# Altium PCB ITKS.685623.177 SB.PcbDoc
Units mm, origin at the board's own origin, x right, y up, seen from the top; angles counter-clockwise.
Board outline 62.5 x 52.5 mm, 2 copper layers (Top Layer, Bottom Layer); 62 components, 39 nets, 289 pads, 80 vias.
Unrouted connection lines stored in the file: 2.
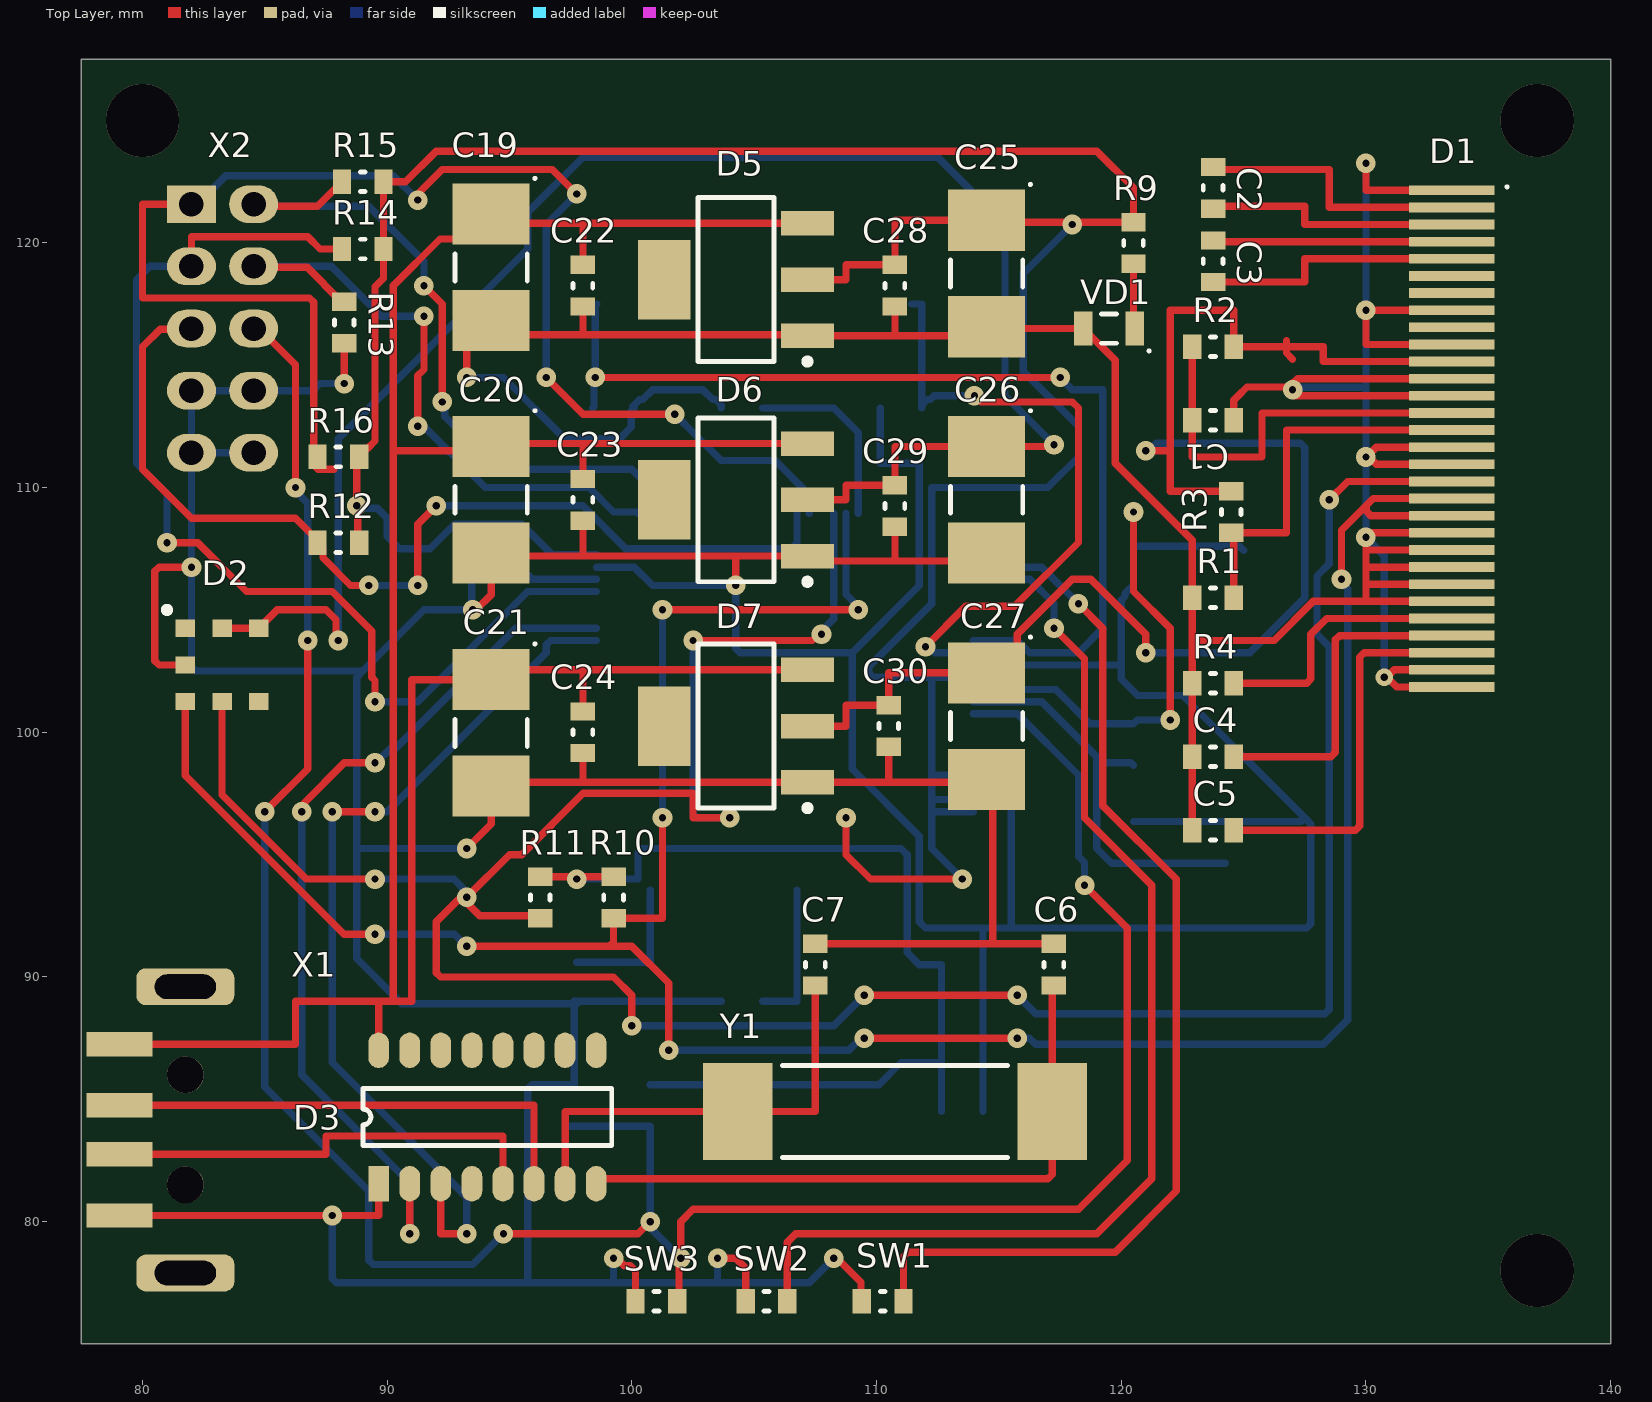
[diagram p0: Top Layer view]
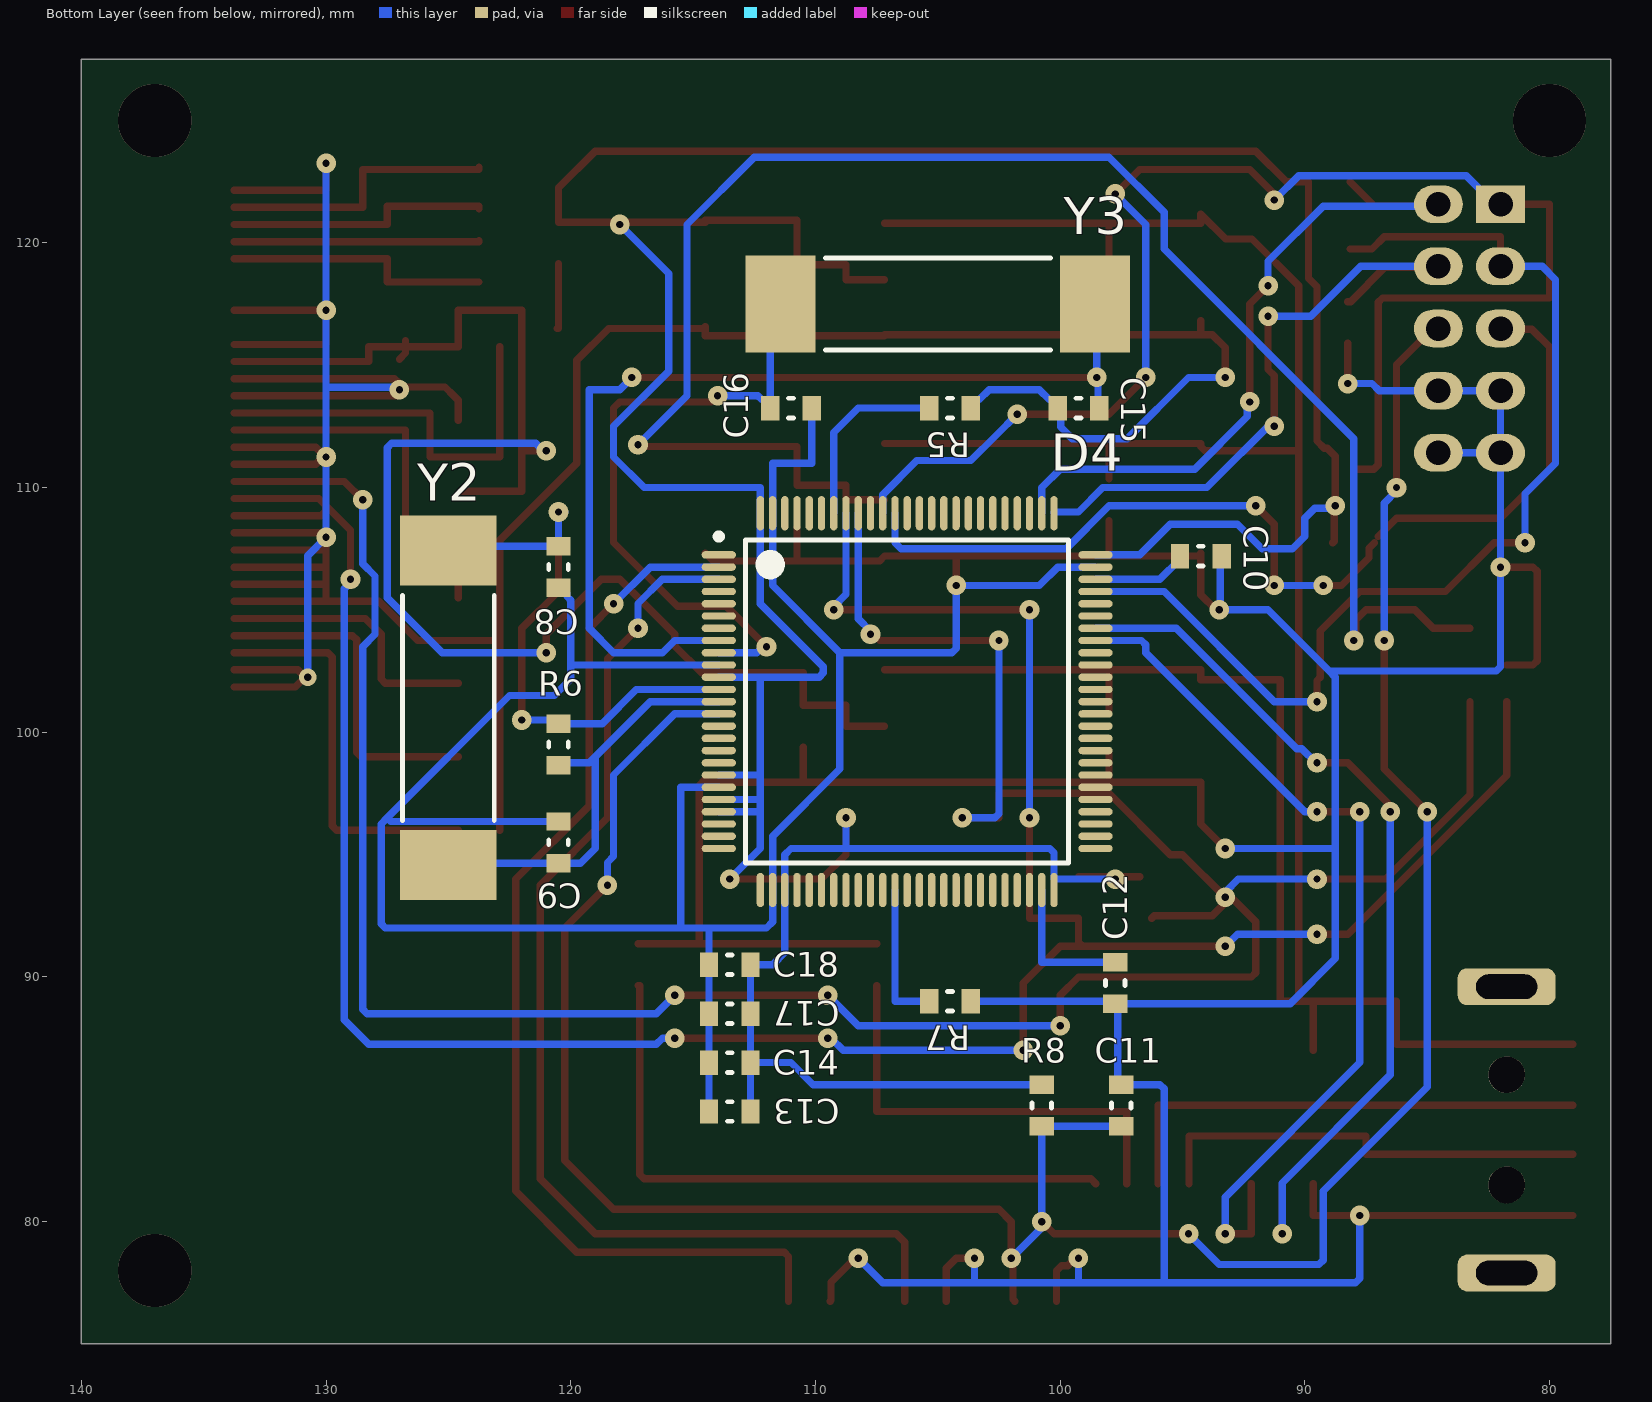
[diagram p1: Bottom Layer view, seen from below]

## Layer stack, top to bottom
Top Solder: solder mask 0.0102, Solder Resist, Dk 3.5
Top Layer: signal copper 0.0356
Dielectric 1: dielectric 0.32, FR-4, Dk 4.8
Bottom Layer: signal copper 0.0356
Bottom Solder: solder mask 0.0102, Solder Resist, Dk 3.5

## Board outline
77.5,75 140,75 140,127.5 77.5,127.5

## Design rules (kind name [scope] priority, off if disabled: settings)
Clearance [All] p1: gap=0.2 ignorepadtopadclearanceinfootprint=FALSE
PolygonConnect [All] p1: connectstyle=Relief reliefconductorwidth=0.254 reliefentries=4 polygonreliefangle="90 Angle" airgapwidth=0.254
RoutingVias [All] p1: holewidth=0.711 width=1.27 viastyle="Through Hole" minholewidth=0.711 minwidth=1.27 maxholewidth=0.711 maxwidth=1.27
SolderMaskExpansion [All] p1: expansion=0.102 istentingtop=FALSE
Width [All] p1: maxlimit=0.4 minlimit=0.2 preferedwidth=0.3 minimp=50.000000 maximp=50.000000 favimp=50.000000
30 further rules are at their usual default settings.

## Components (designator, comment, footprint, x,y, rotation, side; value= is the part's Value field where it differs from the comment)
C1 "104" 0603 123.75,112.75 r180 top
C2 "104" 0603 123.75,122.25 r270 top
C3 "104" 0603 123.75,119.25 r270 top
C4 "475" 0603 123.75,99 r0 top
C5 "225" 0603 123.75,96 r0 top
C6 "22" 0603 117.25,90.5 r90 top
C7 "22" 0603 107.5,90.5 r90 top
C8 "22" 0603 120.5,106.75 r270 bottom
C9 "22" 0603 120.5,95.5 r90 bottom
C10 "104" 0603 94.25,107.2 r180 bottom (schematic designator С10)
C11 "104" 0603 97.5,84.75 r270 bottom
C12 "104" 0603 97.75,89.75 r270 bottom
C13 "104" 0603 113.5,84.5 r0 bottom
C14 "104" 0603 113.5,86.5 r0 bottom
C15 "12" 0603 99.25,113.25 r180 bottom
C16 "12" 0603 111,113.25 r0 bottom
C17 "104" 0603 113.5,88.5 r0 bottom
C18 "104" 0603 113.5,90.5 r0 bottom
C19 "106" EIA_6032–28 94.25,119 r270 top
C20 "106" EIA_6032–28 94.25,109.5 r270 top
C21 "106" EIA_6032–28 94.25,99.975 r270 top
C22 "104" 0603 98,118.25 r90 top
C23 "104" 0603 98,109.5 r90 top
C24 "104" 0603 98,100 r90 top
C25 "106" EIA_6032–28 114.5,118.75 r270 top
C26 "106" EIA_6032–28 114.5,109.5 r270 top
C27 "106" EIA_6032–28 114.5,100.25 r270 top
C28 "104" 0603 110.75,118.25 r90 top
C29 "104" 0603 110.75,109.25 r90 top
C30 "104" 0603 110.5,100.25 r90 top
D1 "SSD1306 OLED" SSD1306 134.75,112 r0 top
D2 "BMP180" BMP180 65.5,104.25 r180 top
D3 "CH340G" SOP16 89.65,81.55 r90 top
D4 "STM32F407VE" LQFP100 106.25,101.25 r180 bottom
D5 "AMS1117-3.3L" SOT223-4N 104.25,118.5 r180 top
D6 "AMS1117-3.3L" SOT223-4N 104.25,109.5 r180 top
D7 "AMS1117-3.3L" SOT223-4N 104.25,100.25 r180 top
R1 "100" 0603 123.75,105.5 r180 top
R2 "4.7k" 0603 123.75,115.75 r180 top
R3 "10" 0603 124.5,109 r270 top
R4 "410k" 0603 123.75,102 r180 top
R5 "10k" 0603 104.5,113.25 r180 bottom
R6 "1M" 0603 120.5,99.5 r90 bottom
R7 "10k" 0603 104.5,89 r0 bottom
R8 "10k" 0603 100.75,84.75 r90 bottom
R9 "510" 0603 120.5,120 r270 top
R10 "4.7k" 0603 99.25,93.25 r90 top
R11 "4.7k" 0603 96.25,93.25 r90 top
R12 "10k" 0603 88,107.75 r0 top
R13 "10k" 0603 88.25,116.75 r270 top
R14 "10k" 0603 89,119.75 r0 top
R15 "10k" 0603 89,122.5 r0 top
R16 "10k" 0603 88,111.25 r0 top
SW1 "Mode(KEY1)" 0603 110.25,76.75 r0 top
SW2 "Count (KEY0)" 0603 105.5,76.75 r0 top
SW3 "RST" 0603 101,76.75 r0 top
VD1 "LED SMD 0805" "Led Diode 0805" 119.5,116.5 r180 top
X1 "USB-A" "USB-ASM (DS1098-B)" 81.75,83.75 r90 top
X2 "PLC-10" PLC-10 82,121.58 r0 top
Y1 "12M" HC-49SM 110.75,84.5 r0 top
Y2 "8МГц" HC-49SM 125,101 r90 bottom
Y3 "32.768k" HC-49SM 105,117.5 r180 bottom

## Footprints (in the part's own frame and the unit in brackets; to place one, negate y for a bottom-side part, rotate by r counter-clockwise, add the part's x,y. Pads: shape width x height; smd on the part's side, far side on the other; paste and mask are expansions set on the pad)
0603 [mm] "Chip Resistor, 2-Leads, Body 1,63x0,93mm, IPC Medium Density"
  rect 0.75x1 smd: 1(-0.85,0) 2(0.85,0)
  silkscreen extent -0.1,-0.4 0.1,0.4, body extent -0.85,-0.48 0.85,0.47, height 0.45
BMP180 [mm] "CQFP, 4-Leads, Body 33,53x33,53mm, Pitch 1,50mm, IPC Medium Density"
  rect 0.8x0.7 smd: 1(-16.25,0) 3(-19.25,0) 4(-19.25,3) 5(-17.75,3) 6(-16.25,3) 7(-16.25,1.5)
  rect 0.8x0.7 smd mask+0.102: 2(-17.75,0)
  silkscreen extent -15.63,-0.87 -15.38,-0.63
EIA_6032–28 [mm] "Chip Capacitor, 2-Leads, Body 6,00x3,00mm, IPC Medium Density"
  rect 2.5x3.15 smd: 1(-2.175,0) 2(2.175,0)
  silkscreen extent -3.69,-1.47 0.55,1.84, body extent -3,-1.5 3,1.5, height 3
HC-49SM [mm] "Chip BQ"
  rect 2.85x3.95 smd: 1(-6.425,0) 2(6.425,0)
  silkscreen extent -4.6,-1.88 4.6,1.88, body extent -7.5,-1.9 7.5,1.9, height 5
"Led Diode 0805" [mm] "Chip Diode, 2-Leads, Body 2,05x1,25mm, IPC Medium Density"
  rect 0.75x1.4 smd: A(-1.05,0) K(1.05,0)
  silkscreen extent -1.69,-0.6 0.3,0.96
LQFP100 [mm] "SQFP, 100-Leads, Body 14,00x14,00mm, Pitch 0,50mm, IPC Medium Density"
  oval 1.4x0.3 smd mask+0.102: 1(-7.7,6) 2(-7.7,5.5) 3(-7.7,5) 4(-7.7,4.5) 5(-7.7,4) 6(-7.7,3.5) 7(-7.7,3) 8(-7.7,2.5) 9(-7.7,2) 10(-7.7,1.5) 11(-7.7,1) 12(-7.7,0.5) 13(-7.7,0) 14(-7.7,-0.5) 15(-7.7,-1) 16(-7.7,-1.5) 17(-7.7,-2) 18(-7.7,-2.5) 19(-7.7,-3) 20(-7.7,-3.5) 21(-7.7,-4) 22(-7.7,-4.5) 23(-7.7,-5) 24(-7.7,-5.5) 25(-7.7,-6) 51(7.7,-6) 52(7.7,-5.5) 53(7.7,-5) 54(7.7,-4.5) 55(7.7,-4) 56(7.7,-3.5) 57(7.7,-3) 58(7.7,-2.5) 59(7.7,-2) 60(7.7,-1.5) 61(7.7,-1) 62(7.7,-0.5) 63(7.7,0) 64(7.7,0.5) 65(7.7,1) 66(7.7,1.5) 67(7.7,2) 68(7.7,2.5) 69(7.7,3) 70(7.7,3.5) 71(7.7,4) 72(7.7,4.5) 73(7.7,5) 74(7.7,5.5) 75(7.7,6)
  oval 0.3x1.4 smd mask+0.102: 26(-6,-7.7) 27(-5.5,-7.7) 28(-5,-7.7) 29(-4.5,-7.7) 30(-4,-7.7) 31(-3.5,-7.7) 32(-3,-7.7) 33(-2.5,-7.7) 34(-2,-7.7) 35(-1.5,-7.7) 36(-1,-7.7) 37(-0.5,-7.7) 38(0,-7.7) 39(0.5,-7.7) 40(1,-7.7) 41(1.5,-7.7) 42(2,-7.7) 43(2.5,-7.7) 44(3,-7.7) 45(3.5,-7.7) 46(4,-7.7) 47(4.5,-7.7) 48(5,-7.7) 49(5.5,-7.7) 50(6,-7.7) 76(6,7.7) 77(5.5,7.7) 78(5,7.7) 79(4.5,7.7) 80(4,7.7) 81(3.5,7.7) 82(3,7.7) 83(2.5,7.7) 84(2,7.7) 85(1.5,7.7) 86(1,7.7) 87(0.5,7.7) 88(0,7.7) 89(-0.5,7.7) 90(-1,7.7) 91(-1.5,7.7) 92(-2,7.7) 93(-2.5,7.7) 94(-3,7.7) 95(-3.5,7.7) 96(-4,7.7) 97(-4.5,7.7) 98(-5,7.7) 99(-5.5,7.7) 100(-6,7.7)
  silkscreen extent -7.83,-6.6 6.6,6.87
PLC-10 [mm]
  rect 2x1.54 hole 1 mask+0.2: 1(0,0)
  oval 2x1.54 hole 1 mask+0.2: 2(2.54,0) 3(0,-2.54) 4(2.54,-2.54) 5(0,-5.08) 6(2.54,-5.08) 7(0,-7.62) 8(2.54,-7.62) 9(0,-10.16) 10(2.54,-10.16)
SOP16 [mm]
  rect 1.45x0.85 smd: 1(0,0)
  oval 1.45x0.85 smd: 2(0,-1.27) 3(0,-2.54) 4(0,-3.81) 5(0,-5.08) 6(0,-6.35) 7(0,-7.62) 8(0,-8.89) 9(5.45,-8.89) 10(5.45,-7.62) 11(5.45,-6.35) 12(5.45,-5.08) 13(5.45,-3.81) 14(5.45,-2.54) 15(5.45,-1.27) 16(5.45,0)
  silkscreen extent 1.56,-9.53 3.89,0.64
SOT223-4N [mm] "SOT223, 4-Leads, Body 6,50x7,00mm (avg), Pitch 2,30mm, IPC Medium Density"
  rect 2.15x1 smd: 1(-2.925,2.3) 2(-2.925,0) 3(-2.925,-2.3)
  rect 2.15x3.25 smd: 4(2.925,0)
  silkscreen extent -3.05,-3.35 1.55,3.47
SSD1306 [mm] "Chip Array, 30 pin"
  rect 3.5x0.4 smd mask+0.102: 1(-1.25,10.15) 2(-1.25,9.45) 3(-1.25,8.75) 4(-1.25,8.05) 5(-1.25,7.35) 6(-1.25,6.65) 7(-1.25,5.95) 8(-1.25,5.25) 9(-1.25,4.55) 10(-1.25,3.85) 11(-1.25,3.15) 12(-1.25,2.45) 13(-1.25,1.75) 14(-1.25,1.05) 15(-1.25,0.35) 16(-1.25,-0.35) 17(-1.25,-1.05) 18(-1.25,-1.75) 19(-1.25,-2.45) 20(-1.25,-3.15) 21(-1.25,-3.85) 22(-1.25,-4.55) 23(-1.25,-5.25) 24(-1.25,-5.95) 25(-1.25,-6.65) 26(-1.25,-7.35) 27(-1.25,-8.05) 28(-1.25,-8.75) 29(-1.25,-9.45) 30(-1.25,-10.15)
  silkscreen extent 0.97,10.24 1.07,10.34
"USB-ASM (DS1098-B)" [mm]
  rect 1x2.7 smd: 1(3.5,2.7) 2(1,2.7) 3(-1,2.7) 4(-3.5,2.7)
  rrect50% 1.5x4 hole 1 slot 2.5 at 90 deg: 5(-5.85,0) 5(5.85,0)
  round 1.5 hole 1.5 unplated: 6(-2.25,0) 6(2.25,0)

## Part data
C1 C2 C3 C4 C5 C6 C7 C8 C9 C10 C11 C12 C13 C14 C15 C16 C17 C18 C22 C23 C24 C28 C29 C30: library part C
C19 C20 C21 C25 C26 C27: library part "C+ TECAP", "TECAP EIA 6032–28"
D4: "ARM3"
R1 R2 R3 R4 R5 R6 R7 R8 R9 R10 R11 R12 R13 R14 R15 R16: library part R
SW1 SW2 SW3: library part Button
Y1 Y2 Y3: library part BQ

## Via types
v1: diameter 0.8, hole 0.3, Top Layer to Bottom Layer, 76 vias
v2: diameter 3, hole 3, Top Layer to Bottom Layer, 3 vias
v3: diameter 0.7, hole 0.3, Top Layer to Bottom Layer, 1 vias

## Nets (pads, with @x,y where several pads share a name; then routed paths per layer and width w, separated by ;. In a path a pad name is that pad's centre, name@x,y a point inside that pad or via, vN(x,y) a via of type N, cw(c..) or ccw(c..) an arc to the next point about the centre after c; other vN are vias at no path point)
+3.3В: C13.1 C14.1 C17.1 C18.1 C25.1 C28.2 D4.11 D4.19 D4.21 D4.22 D4.28 D4.50 D4.75 D4.100 D5.2 R8.2 R9.1 R10.2 R11.2 R12.2 R14.2 R15.2 R16.2 | length 170.2
  Top Layer w0.3: R12.2 88.8,107.8 88.8,109.2 v1(88.75,109.25) 88.75,111.275 89.075,111.6 89.2,111.6 89.5,111.9 89.5,118.207 89.85,118.557 R14.2 R15.2 90.75,122.5 92,123.75 119,123.75 120.5,122.25 R9.1 114.5,120.85 C25.1 110.75,120.925 C28.2 108.75,119.1 108.75,118.5 D5.2 ; R11.2@96.75,94.1 R10.2 ; v1(108.75,96.5) 108.75,95 109.75,94 v1(113.5,94)
  Bottom Layer w0.3: v1(88.75,109.25) 88.846,109.154 89.596,109.154 90,108.75 90,108 90.5,107.5 91.75,107.5 92.75,108.5 95.5,108.5 96.75,107.25 D4.75 ; v1(97.75,94) 100.25,94 100.25,95.074 100.426,95.25 108.75,95.25 ; R8.2 110.1,85.6 111,86.5 C14.1 ; v1(108.75,96.5) 108.75,95.25 ; C13.1 C14.1 ; v1@113.5,93.75 v1(113.5,94) 112.25,95.25 112.25,96.75 ; D4.22 112.25,96.75 ; D4.21 112.25,97.25 ; D4.19 112.25,98.25 ; D4.11 112.25,102.25 ; v1(118,120.75) 116,118.75 116,114.75 118.25,112.5 118.25,111.25 117,110 112.25,110 D4.100 112.25,105.25 109.674,102.674 109.674,102.426 109.85,102.25 112.25,102.25 ; 108.75,95.25 111,95.25 111.25,95 D4.28 111.25,91 111.75,90.5 C18.1 C17.1 C14.1 ; 112.25,96.75 112.25,97.25 ; 112.25,97.25 112.25,98.25 ; 112.25,98.25 112.25,102.25
+3.3В_BMP: C26.1 C29.2 D2.2 D2.3 D6.2 | length 70.4
  Top Layer w0.3: D2.2 D2.3 85.5,105 87.5,105 87.904,104.596 87.904,103.846 v1(88,103.75) ; D6.2 108.75,109.5 108.75,110.1 C29.2 110.75,111.675 C26.1 117.175,111.675 v1(117.25,111.75)
  Bottom Layer w0.3: v1(88,103.75) 88,112 95.75,119.75 95.75,121.25 98,123.5 112.5,123.5 115.25,120.75 115.25,113.75 v1(117.25,111.75)
+3.3В_SSD: C27.1 C30.2 D1.9 D1.11 D7.2 R2.1 R3.1 | length 64.6
  Top Layer w0.3: D7.2 108.75,100.25 108.75,101.1 C30.2 110.5,102.425 114.65,102.425 115.75,103.525 115.75,104 118,106.25 118.75,106.25 121,104 v1(121,103.25) ; v1(121,111.5) 122,111.5 ; R3.1 122,109.85 122,111.5 ; D1.11@133.75,115.15 128.25,115.15 128.25,115.75 R2.1 124.6,117.25 122,117.25 122,111.5
  Bottom Layer w0.3: v1(121,103.25) 125.25,103.25 127.5,105.5 127.5,111.63 127.324,111.805 121.426,111.805 121.12,111.5 v1(121,111.5)
+5: C19.1 C20.1 C21.1 C22.2 C23.2 C24.2 D3.16 D5.3 D6.3 D7.3 X1.1 | length 115.1
  Top Layer w0.3: X1.1 86.25,87.25 86.25,89 89.65,89 ; D3.16 89.65,89 ; 90.966,89 90.25,89 ; 90.996,89 90.996,102.15 ; 91.026,102.15 91.1,102.15 C21.1 94.25,102.55 98,102.55 ; C24.2 98,102.55 ; C23.2 98,111.8 ; C22.2 98,120.8 ; D7.3 98,102.55 ; D6.3 98,111.8 ; D5.3 98,120.8 ; 89.65,89 90.25,89 ; 90.25,89 90.25,111.5 ; 90.25,111.5 94.075,111.5 C20.1 94.25,111.8 98,111.8 ; 90.25,111.5 90.25,118.25 92.157,120.157 93.232,120.157 C19.1 94.25,120.8 98,120.8
GND: C1.1 C4.1 C5.1 C6.2 C7.2 C8.2 C9.2 C10.2 C11.1 C12.2 C13.2 C14.2 C15.1 C16.1 C17.2 C18.2 C19.2 C20.2 C21.2 C22.1 C23.1 C24.1 C25.2 C26.2 C27.2 C28.1 C29.1 C30.1 D1.1 D1.8 D1.10 D1.12 D1.13 D1.16 D1.17 D1.21 D1.22 D1.23 D1.24 D1.25 D1.29 D1.30 D2.7 D3.1 D4.10 D4.20 D4.27 D4.74 D4.99 D5.1 D6.1 D7.1 R1.2 R4.2 R5.2 R7.1 R13.2 SW1.1 SW2.1 SW3.1 VD1.K X1.4 X2.7 X2.8 X2.9 X2.10 | length 467.4
  Top Layer w0.3: X1.4 v1(87.75,80.25) 89.65,80.25 D3.1 ; D2.7 80.676,102.75 80.5,102.926 80.5,106.574 80.676,106.75 v1(82,106.75) ; v1(88.25,114.25) R13.2 ; v1(93.25,95.25) 94.25,96.25 C21.2 94.25,97.95 98,97.95 ; v1(93.25,114.5) 93.25,115.725 93.775,116.25 C19.2@94.25,116.25 ; v1(93.5,105) 93.625,105 94.25,105.625 C20.2@94.25,107.2 ; C20.2 C20.2@94.25,107.2 ; C19.2 C19.2@94.25,116.25 ; C24.1 98,97.95 ; C23.1 98,107.2 ; C22.1 98,116.25 ; v1(99.25,78.5) 99.385,78.5 99.693,78.192 99.944,78.192 100.15,77.986 SW3.1 ; v1(103.5,78.5) 104.25,78.5 104.65,78.1 SW2.1 ; v1(104.25,106) 104.25,107.2 ; C7.2 114.75,91.35 ; v1(108.25,78.5) 108.385,78.5 109.361,77.524 109.361,76.789 SW1.1 ; C30.1 110.5,97.95 ; C29.1 110.75,107 ; C28.1 110.75,116.2 ; C26.2 114.175,107 110.75,107 ; C25.2 C25.2@114.5,116.5 ; C6.2 114.75,91.35 ; C5.1 C4.1 R4.2 122.9,103.75 ; C1.1 124.6,113.574 124.776,113.75 125.136,114.11 v1@126.75,114.11 ; v1@127.036,114.286 127.2,114.45 D1.12@133.75,114.45 ; v1@127.112,113.75 D1.13@133.75,113.75 ; v1@130,108 v1(130,107.966) 130,107.45 ; v1@130,108.15 D1.21@133.75,108.15 ; v1(130,123.25) 130,122.15 D1.1@133.75,122.15 ; v3(130.75,102.25) v3@130.858,102.25 ; D1.30@133.75,101.85 131.258,101.85 v3@130.858,102.25 ; D1.29@133.75,102.55 131.158,102.55 v3@130.858,102.25 ; D1.25@133.75,105.35 130,105.35 ; D1.24@133.75,106.05 130,106.05 ; D1.23@133.75,106.75 130,106.75 ; D1.22@133.75,107.45 130,107.45 ; D1.17@133.75,110.95 130.426,110.95 130.126,111.25 v1(130,111.25) 130.026,111.25 130.426,111.65 D1.16@133.75,111.65 ; D1.10@133.75,115.85 130,115.85 v1(130,117.25) D1.8@133.75,117.25 ; C20.2@94.25,107.2 98,107.2 ; C19.2@94.25,116.25 98,116.25 ; 98,97.95 D7.1 110.5,97.95 ; 98,107.2 104.25,107.2 ; 98,116.25 107.175,116.25 D5.1 110.75,116.2 ; 104.25,107.2 D6.1 107.375,107 110.75,107 ; 110.5,97.95 114.5,97.95 C27.2 114.75,97.825 114.75,91.35 ; 110.75,116.2 114.5,116.2 C25.2@114.5,116.5 ; C25.2@114.5,116.5 VD1.K 119.75,115.2 119.75,111 122.9,107.85 R1.2 122.9,103.75 ; 122.9,103.75 126.25,103.75 127.85,105.35 130,105.35 ; 130,105.35 130,106.05 ; 130,106.05 130,106.75 ; 130,106.75 130,107.45
  Bottom Layer w0.3: X2.10 X2.9 ; v1(87.75,80.25) 87.75,77.676 87.926,77.5 95.75,77.5 ; v1(88.25,114.25) 87.25,114.25 86.96,113.96 X2.8 X2.7 X2.9 ; v1(93.25,95.25) 88.75,95.25 ; C10.2@93.325,107.275 93.45,107.15 93.45,105.05 v1(93.5,105) 91.5,105 89,102.5 ; v1@93.325,114.425 v1(93.25,114.5) 94.75,114.5 97.25,112 99.5,112 99.976,112.476 99.976,113.126 C15.1 ; C12.2@97.65,89 R7.1 ; C12.2 C12.2@97.65,88.9 ; D4.74 100.1,106.75 100.85,106 v1(104.25,106) 104.25,103.426 104.426,103.25 109,103.25 ; v1(99.25,78.5) 99.25,77.5 ; C15.1@100.037,113.312 100.325,113.6 100.45,113.6 100.85,114 102.9,114 103.3,113.6 103.425,113.6 103.65,113.375 R5.2 ; v1(103.5,78.5) 103.5,77.5 ; v1(108.25,78.5) 107.25,77.5 103.5,77.5 ; C16.1 110.15,111 111.75,111 D4.99 111.75,106 109,103.25 ; D4.20 115.5,97.75 115.5,92 ; D4.10 120,102.75 ; C13.2 C14.2 C17.2 C18.2 114.35,91.9 114.25,92 ; C9.2 127.35,96.35 127.5,96.5 ; C8.2 120.375,105.9 120.15,105.675 120.15,105.55 120,105.4 120,102.75 ; v1@127,114.1 130,114.1 ; v1(130,123.25) v1(130,117.25) 130,114.1 ; v3(130.75,102.25) 130.75,107.216 v1(130,107.966) 130,114.1 ; X2.9 v1(82,106.75) 82,102.676 82.176,102.5 89,102.5 ; 88.75,95.25 88.75,90.75 90.6,88.9 C12.2@97.65,88.9 ; 88.75,95.25 88.75,102.25 89,102.5 ; 95.75,77.5 99.25,77.5 ; 95.75,77.5 95.75,85.424 95.926,85.6 C11.1 97.65,85.6 C12.2@97.65,88.9 ; 99.25,77.5 103.5,77.5 ; 109,103.25 109,98.5 111.75,95.75 D4.27 111.75,92.25 112,92 114.25,92 ; 114.25,92 115.5,92 ; 115.5,92 127.574,92 127.75,92.176 127.75,96.25 127.5,96.5 ; 120,102.75 120,102.176 120.676,101.5 122.5,101.5 127.5,96.5
  other v1: 127,114
NetC1_2: C1.2 D1.14 R2.2 | length 17.1
  Top Layer w0.3: R2.2 C1.2 122.9,111.25 125.75,111.25 125.75,113.05 D1.14@133.75,113.05
NetC2_1: C2.1 D1.2 | length 11.7
  Top Layer w0.3: C2.1 123.75,123 128.5,123 128.5,121.45 D1.2@133.75,121.45
NetC2_2: C2.2 D1.3 | length 10.9
  Top Layer w0.3: C2.2 123.75,121.5 127.5,121.5 127.5,120.75 D1.3@133.75,120.75
NetC3_1: C3.1 D1.4 | length 10.1
  Top Layer w0.3: C3.1 123.75,120.05 D1.4@133.75,120.05
NetC3_2: C3.2 D1.5 | length 10.9
  Top Layer w0.3: C3.2 127.5,118.4 127.5,119.35 D1.5@133.75,119.35
NetC4_2: C4.2 D1.27 | length 13.9
  Top Layer w0.3: C4.2 128.574,99 128.75,99.176 128.75,103.774 128.926,103.95 D1.27@133.75,103.95
NetC5_2: C5.2 D1.28 | length 16.2
  Top Layer w0.3: C5.2 129.574,96 129.75,96.176 129.75,103.074 129.926,103.25 D1.28@133.75,103.25
NetC6_1: C6.1 D3.8 Y1.2 | length 26.6
  Top Layer w0.3: D3.8 98.74,81.75 116.999,81.75 117.175,81.926 Y1.2 117.175,89.65 C6.1
NetC7_1: C7.1 D3.7 Y1.1 | length 18.3
  Top Layer w0.3: D3.7 97.27,84.5 Y1.1 107.5,84.5 C7.1
NetC8_1: C8.1 D4.12 R6.2 Y2.2 | length 23.9
  Top Layer w0.3: v1(120.5,109) 120.5,105.75 122,104.25 v1(122,100.5)
  Bottom Layer w0.3: D4.12 117.316,101.75 118.716,100.35 R6.2 120.65,100.5 v1(122,100.5) ; v1@120.25,109 120.5,108.75 C8.1 124.825,107.6 Y2.2
NetC9_1: C9.1 D4.13 R6.1 Y2.1 | length 16.9
  Bottom Layer w0.3: D4.13 116.75,101.25 119,99 ; R6.1 120.4,98.75 119.25,98.75 119,99 ; Y2.1@124.25,94.65 119.6,94.65 119,95.25 119,99
NetC10_1: C10.1 D4.73 | length 3.9
  Bottom Layer w0.3: C10.1 95.1,107.075 95.925,106.25 D4.73
NetC12_1: C12.1 D4.49 | length 6
  Bottom Layer w0.3: C12.1 100.75,90.6 D4.49
NetC15_2: C15.2 D4.8 Y3.2 | length 41
  Top Layer w0.3: v1(98.5,114.5) v1(117.5,114.5)
  Bottom Layer w0.3: C15.2 98.45,113.3 98.45,114.45 v1(98.5,114.5) 98.5,117.425 Y3.2 ; D4.8 115.75,103.75 116.25,103.25 118.25,103.25 119.25,104.25 119.25,114 118,114 v1(117.5,114.5)
NetC16_2: C16.2 D4.9 Y3.1 | length 27
  Top Layer w0.3: v1(112,103.5) 113.644,105.144 115.639,105.144 118.25,107.755 118.25,113.25 118,113.5 114.25,113.5 v1(114,113.75)
  Bottom Layer w0.3: Y3.1 111.85,117.5 C16.2@111.85,113.375 ; C16.2 C16.2@111.85,113.375 ; v1(112,103.5) 112.135,103.5 112.385,103.25 D4.9 ; v1(114,113.75) 112.35,113.75 112.2,113.6 112.075,113.6 C16.2@111.85,113.375
NetD1_15: D1.15 R1.1 R3.2 | length 15.9
  Top Layer w0.3: R3.2 124.6,108.05 R1.1 ; R3.2@124.75,108.15 126.75,108.15 126.75,112.35 D1.15@133.75,112.35
NetD1_26: D1.26 R4.1 | length 11.3
  Top Layer w0.3: R4.1 127.574,102 127.75,102.176 127.75,104 128.4,104.65 D1.26@133.75,104.65
NetD3_5: D3.5 X1.3 | length 18.4
  Top Layer w0.3: X1.3 87.5,82.75 87.5,83.5 94.73,83.5 D3.5
NetD3_6: D3.6 X1.2 | length 20.2
  Top Layer w0.3: X1.2 96,84.75 D3.6
NetD4_2: D4.2 SW1.2 | length 44.7
  Top Layer w0.3: SW1.2 111.1,78.574 111.276,78.75 119.75,78.75 122.25,81.25 122.25,94 119.25,97 119.25,104.25 v1(118.25,105.25)
  Bottom Layer w0.3: D4.2 116.75,106.75 v1(118.25,105.25)
NetD4_3: D4.3 SW2.2 | length 47.3
  Top Layer w0.3: SW2.2 106.35,79.15 106.7,79.5 119,79.5 121.25,81.75 121.25,93.75 118.5,96.5 118.5,103 v1(117.25,104.25)
  Bottom Layer w0.3: D4.3 116.262,106.25 117.25,105.262 v1(117.25,104.25)
NetD4_37: D4.37 R7.2 | length 6
  Bottom Layer w0.3: R7.2 106.75,89 D4.37
NetD4_94: D4.94 R5.1 | length 7.6
  Bottom Layer w0.3: R5.1 108.25,113.25 109.25,112.25 D4.94
NetR9_2: R9.2 VD1.A | length 2.7
  Top Layer w0.3: R9.2 120.5,116.5 VD1.A
RST: C11.2 D4.14 R8.1 SW3.2 X2.6 | length 107.6
  Top Layer w0.3: X2.6 84.77,116.5 86.25,115.02 v1(86.25,110) ; v1(85,96.75) 86.75,98.5 v1(86.75,103.75) ; v1(94.75,79.5) 100.25,79.5 v1(100.75,80) ; SW3.2 101.925,76.825 101.925,78.425 v1(102,78.5) 102,80 102.5,80.5 118.25,80.5 120.25,82.5 120.25,92 v1(118.5,93.75)
  Bottom Layer w0.3: v1(85,96.75) 85,85.5 89.25,81.25 89.25,78.426 89.426,78.25 93.5,78.25 v1(94.75,79.5) ; v1(86.25,110) 86.25,109.865 86.75,109.365 v1(86.75,103.75) ; C11.2 R8.1 100.75,79.75 v1(102,78.5) ; D4.14 115.75,100.75 118.25,98.25 118.25,94.926 118.5,94.676 v1(118.5,93.75)
RxD: D3.3 D4.68 | length 36.5
  Top Layer w0.3: v1(87.75,96.75) v1(89.5,96.75) ; D3.3 92.19,79.5 v1(93.25,79.5)
  Bottom Layer w0.3: v1(87.75,96.75) 87.75,86.5 93.25,81 v1(93.25,79.5) ; v1(89.5,96.75) 90,96.75 96.5,103.25 96.5,103.574 96.676,103.75 D4.68
SCL: D1.18 D2.5 D4.92 R11.1 | length 121.4
  Top Layer w0.3: D2.5 83.25,97.439 86.689,94 v1(89.5,94) ; R11.1 96.15,92.5 93.786,92.5 93.25,93.036 v1(93.25,93.25) ; v1(100,88) 100,89.25 99.25,90 92.176,90 92,90.176 92,92.25 92.904,93.154 93.154,93.154 v1(93.25,93.25) ; v1(102.5,103.75) 107.365,103.75 107.615,104 v1(107.75,104) ; v1(104,96.5) 102.5,96.5 102.5,97.5 98,97.5 95.5,95 95,95 v1(93.25,93.25) ; v1(109.5,89.25) v1(115.75,89.25) ; v1(128.5,109.5) 129.25,110.25 D1.18@133.75,110.25
  Bottom Layer w0.3: v1(89.5,94) 92.714,94 93.25,93.464 v1(93.25,93.25) ; v1(100,88) 108.25,88 v1(109.5,89.25) ; v1(102.5,103.75) 102.5,96.676 102.676,96.5 v1(104,96.5) ; v1(107.75,104) 107.75,104.135 108.25,104.635 D4.92 ; v1(115.75,89.25) 116.5,88.5 128.324,88.5 128.5,88.676 128.5,103.5 128,104 128,106.385 128.5,106.885 v1(128.5,109.5)
SDA: D1.19 D1.20 D2.6 D4.93 R10.1 | length 114.9
  Top Layer w0.3: D2.6 81.75,98.232 88.232,91.75 v1(89.5,91.75) ; v1(93.25,91.25) 99.074,91.25 ; v1(101.25,96.5) 101.25,92.4 R10.1 99.25,91.426 99.074,91.25 ; v1(101.5,87) 101.5,89.75 100,91.25 99.074,91.25 ; v1@101.5,105 v1(109.25,105) ; v1(109.5,87.5) v1(115.75,87.5) ; v1@129,106.024 v1(129,106.25) 129,108.25 130.024,109.274 ; D1.20@133.75,108.85 130.2,108.85 130.024,109.026 130.024,109.274 ; D1.19@133.75,109.55 130.3,109.55 130.024,109.274
  Bottom Layer w0.3: v1(89.5,91.75) 92.75,91.75 v1(93.25,91.25) ; v1(101.25,96.5) v1(101.25,105) ; v1(101.5,87) 108.865,87 109.365,87.5 v1(109.5,87.5) ; D4.93 108.75,105.635 109.25,105.135 v1(109.25,105) ; v1(115.75,87.5) 116.25,87.5 116.5,87.25 128.25,87.25 129.25,88.25 129.25,105.865 129,106.115 v1(129,106.25)
TCK: D4.76 R13.1 X2.4 | length 27.6
  Top Layer w0.3: X2.4 84.58,119 86.725,119 88.125,117.6 R13.1 ; v1(91.25,112.5) 91.25,114.577 91.5,114.827 v1(91.5,117)
  Bottom Layer w0.3: X2.4 87.71,119.04 89.75,117 v1(91.5,117) ; v1(91.25,112.5) 91.25,112.75 94,110 98.25,110 99.25,109 100.25,109 D4.76
TDI: D4.77 R15.1 X2.2 | length 29.4
  Top Layer w0.3: X2.2 84.54,121.5 87.15,121.5 R15.1 ; v1(91.5,118.25) 92.25,117.5 v1(92.25,113.5)
  Bottom Layer w0.3: X2.2 84.62,121.5 89.25,121.5 91.5,119.25 v1(91.5,118.25) ; v1(92.25,113.5) 92.346,113.404 92.346,112.904 94.5,110.75 100,110.75 100.75,110 D4.77
TDO: D4.89 R12.1 X2.5 | length 40.8
  Top Layer w0.3: X2.5 81.976,116.476 80.726,116.476 80,115.75 80,110.75 82,108.75 86.25,108.75 R12.1@87,108 ; R12.1 87.375,107.525 87.375,107.125 88.5,106 v1(89.25,106) ; v1(91.25,106) 91.25,108.5 v1(92,109.25)
  Bottom Layer w0.3: v1(89.25,106) v1(91.25,106) ; v1(92,109.25) 98,109.25 99.75,107.5 106.5,107.5 106.75,107.75 D4.89
TMS: D4.72 R14.1 X2.3 | length 45
  Top Layer w0.3: v1(81,107.75) 82.25,107.75 84.25,105.75 87.75,105.75 89.364,104.136 89.364,102.25 89.5,102.114 v1(89.5,101.25) ; X2.3 82,120.25 86.75,120.25 87.25,119.75 R14.1
  Bottom Layer w0.3: v1(81,107.75) 81,109.75 79.75,111 79.75,118.5 80.29,119.04 X2.3 ; v1(89.5,101.25) 91.25,101.25 95.75,105.75 D4.72
TRST: D4.90 R16.1 X2.1 | length 59.7
  Top Layer w0.3: X2.1 80,121.58 80,117.75 86.824,117.75 87,117.574 87,110.926 87.176,110.75 87.827,110.75 ; v1(91.25,121.75) 91.25,122 92.25,123 96.75,123 v1(97.75,122) ; v1(96.5,114.5) 98,113 v1(101.75,113)
  Bottom Layer w0.3: X2.1 82.23,121.58 83.4,122.75 90.25,122.75 v1(91.25,121.75) ; v1(96.5,114.5) 96.5,120.75 v1(97.75,122) ; v1(101.75,113) 102.621,112.129 103.646,111.104 105.854,111.104 107.25,109.707 D4.90
TxD: D3.2 D4.69 | length 36.6
  Top Layer w0.3: v1(86.5,96.75) 86.596,96.846 86.596,97.096 88.25,98.75 v1(89.5,98.75) ; v1@90.75,79.5 v1(90.92,79.5) D3.2
  Bottom Layer w0.3: v1(86.5,96.75) 86.5,86 90.92,81.58 v1(90.92,79.5) ; v1(89.5,98.75) 89.538,98.75 90.12,99.332 90.332,99.332 95.25,104.25 D4.69
pads on no net: D1.6 D1.7 D2.1 D2.4 D3.4 D3.9 D3.10 D3.11 D3.12 D3.13 D3.14 D3.15 D4.1 D4.4 D4.5 D4.6 D4.7 D4.15 D4.16 D4.17 D4.18 D4.23 D4.24 D4.25 D4.26 D4.29 D4.30 D4.31 D4.32 D4.33 D4.34 D4.35 D4.36 D4.38 D4.39 D4.40 D4.41 D4.42 D4.43 D4.44 D4.45 D4.46 D4.47 D4.48 D4.51 D4.52 D4.53 D4.54 D4.55 D4.56 D4.57 D4.58 D4.59 D4.60 D4.61 D4.62 D4.63 D4.64 D4.65 D4.66 D4.67 D4.70 D4.71 D4.78 D4.79 D4.80 D4.81 D4.82 D4.83 D4.84 D4.85 D4.86 D4.87 D4.88 D4.91 D4.95 D4.96 D4.97 D4.98 D5.4 D6.4 D7.4 X1.5 X1.6
copper on no net: | length 0.9
  Top Layer w0.3: 126.75,116 126.75,115.5 127,115.25
  other v2: 137,78 80,125 137,125

## Silkscreen, mask and mechanical layers (free items; w line width, h text height)
Mechanical 1:
  circle w0.254: c80,125 r1.414
  circle w0.254: c137,78 r1.414
  circle w0.254: c137,125 r1.414
  lines w0.254: 77.5,75 77.5,127.5 140,127.5 140,75 77.5,75
Mechanical 15:
  rectangle: 77,74 141,129